# EAGLE board LED_Board_End (EAGLE 7.2.0)
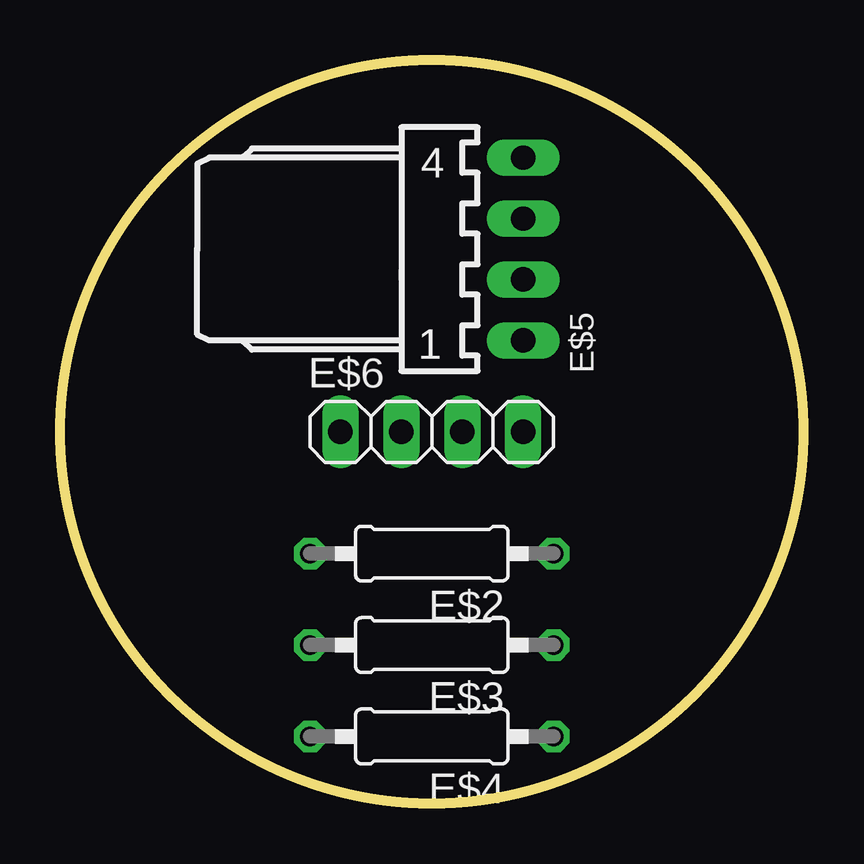
[diagram p0: board, top side]
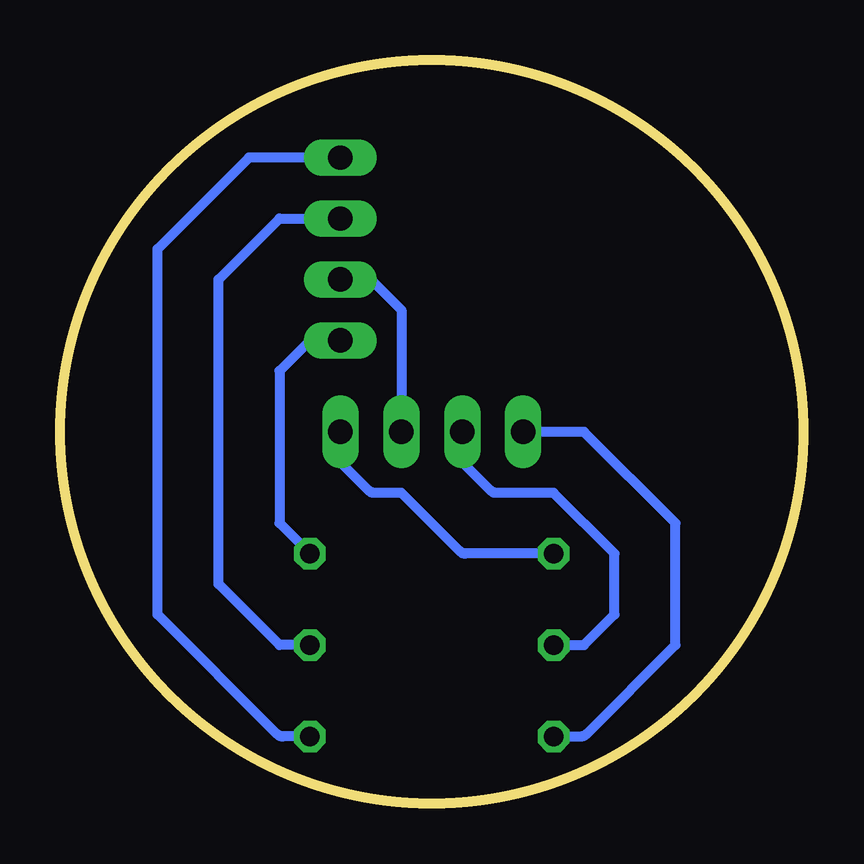
[diagram p1: board, bottom side, seen from below]

Size 31 x 31 mm. Coordinates in mm from the lower left corner, seen from the top.
Outline: circle at 15.5,15.5 radius 15.5
Copper layers (1*16): Top 0.035mm / dielectric 1.5mm / Bottom 0.035mm
Design rules "default": minimum track width 10mil, minimum drill 24mil, track to track 8mil, track to pad 8mil, pad to pad 8mil, via to via 8mil, smd to smd 8mil, copper to edge 40mil, drill to drill 8mil, minimum pad ring 10mil, minimum via ring 8mil, stop-mask expansion 4mil, vias tented up to drill 0mil, thermal gap 10mil

## Footprints (pad centres in the part's own frame; a part is rotated, then mirrored left to right if it is on the bottom)
0207/10 = drill 0.813 octagon: 1 -5.08,0; 2 5.08,0
7395-04 = drill 1.016 long: 1 3.81,0; 2 1.27,0; 3 -1.27,0; 4 -3.81,0
1X04 = drill 1.016 long: 1 -3.81,0; 2 -1.27,0; 3 1.27,0; 4 3.81,0

## Placement (x,y rotation side)
E$2  [0207/10]  15.5,10.42 180 top
E$3  [0207/10]  15.5,6.61 180 top
E$4  [0207/10]  15.5,2.8 180 top
E$5  [7395-04]  19.31,23.12 270 top
E$6  [1X04]  15.5,15.5 0 top

## Library data of the parts
E$2-E$4 = resistor
E$5 = con-molex
E$6 = pinhead

## Nets
S$1: E$3.1 E$5.3
S$2: E$2.1 E$5.1
S$4: E$5.2 E$6.3
S$5: E$4.2 E$6.1
S$6: E$3.2 E$6.2
S$7: E$2.2 E$6.4
S$8: E$4.1 E$5.4

## Tracks (layer width: path | path; a pad name or v marks a point on that pad's centre or on a via)
S$1
  Bottom 0.406: E$3.1 21.85,6.61 24.39,9.15 24.39,21.85 21.85,24.39 E$5.3
S$2
  Bottom 0.406: E$5.1 20.58,19.31 21.85,18.04 21.85,11.69 E$2.1
S$4
  Bottom 0.406: E$5.2 18.17,21.85 arc45 17.95,21.76 16.77,20.58 E$6.3
S$5
  Bottom 0.406: E$4.2 9.28,2.8 arc-45 9.06,2.9 5.34,6.61 5.34,11.69 9.15,15.5 E$6.1
S$6
  Bottom 0.406: E$3.2 9.15,6.61 7.88,7.88 7.88,10.42 10.42,12.96 12.83,12.96 arc45 13.06,13.06 14.23,14.23 E$6.2
S$7
  Bottom 0.406: E$2.2 14.1,10.42 arc45 14.33,10.52 16.77,12.96 17.91,12.96 arc45 18.14,13.06 19.31,14.23 E$6.4
S$8
  Bottom 0.406: E$4.1 21.72,2.8 arc45 21.95,2.9 26.93,7.88 26.93,23.12 23.12,26.93 E$5.4